# Altium PCB FLIR LWIR.PcbDoc (part 2 of 5)
Units mil, origin at the board's own origin, x right, y up, seen from the top; angles counter-clockwise.
Board outline 1511 x 3115 mil, 2 copper layers (Top Layer, Bottom Layer); 105 components, 128 nets, 625 pads, 229 vias.
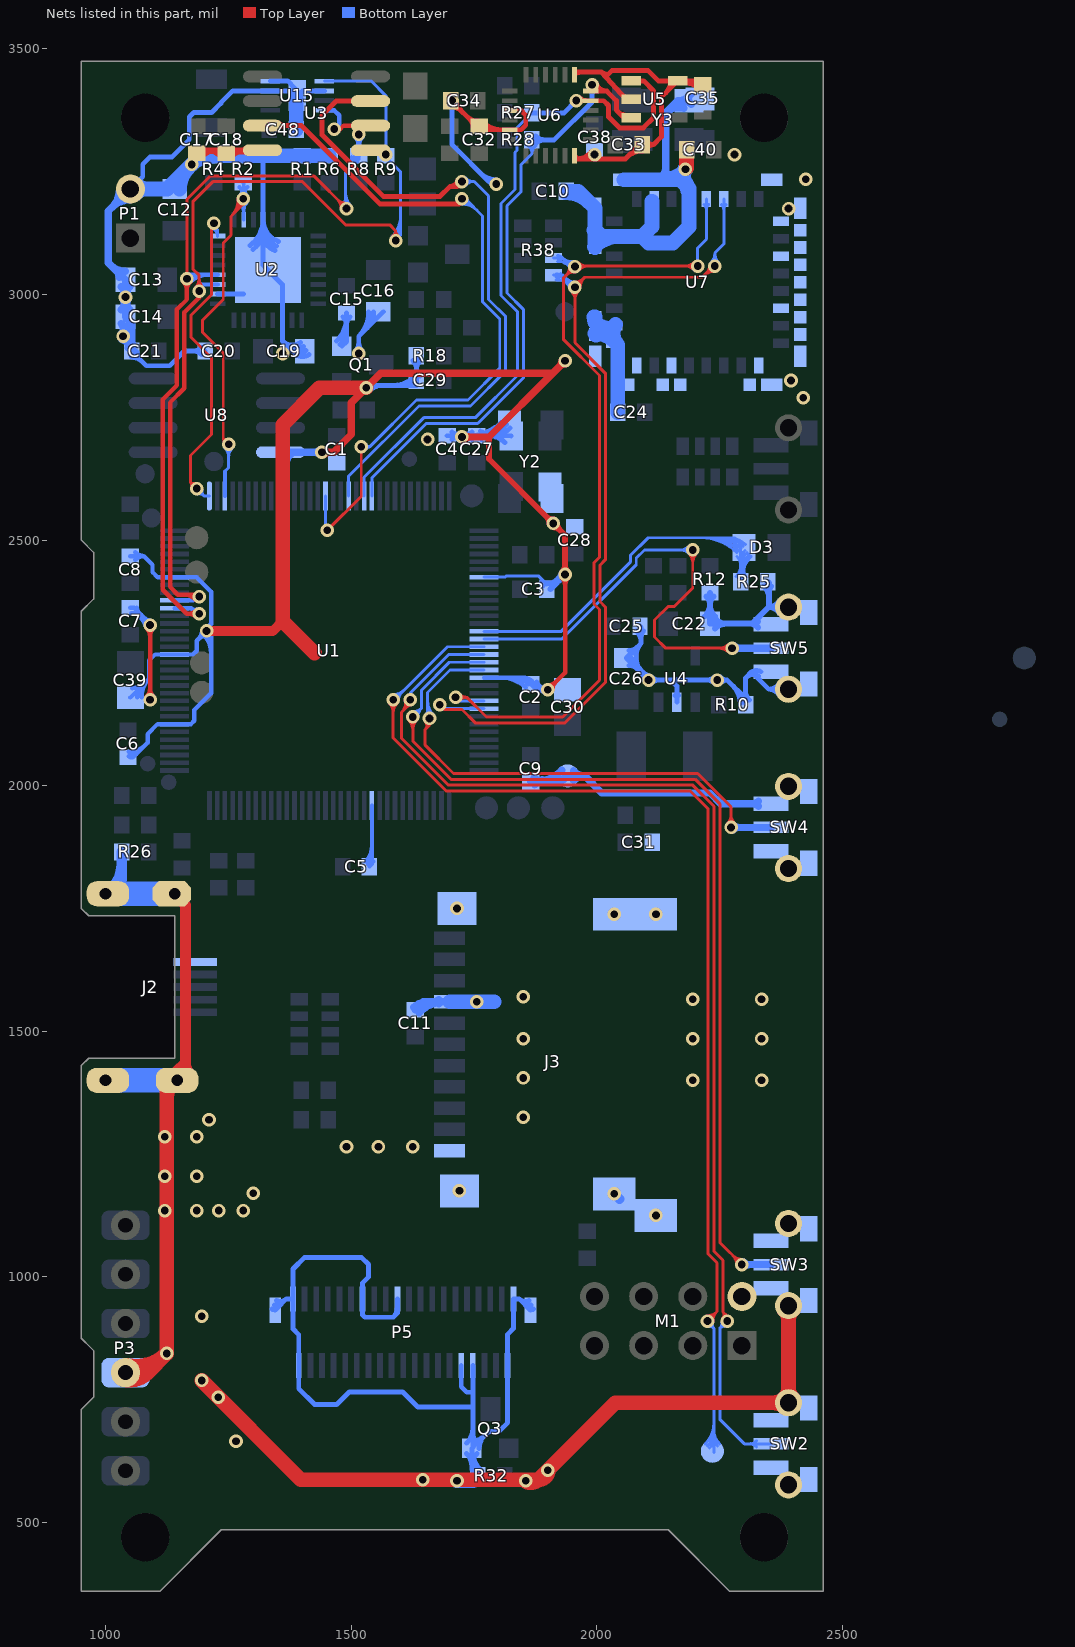
[diagram p2: the nets of this part, all layers, seen from the top]

## Via types
v1: diameter 27.56, hole 15.75, Top Layer to Bottom Layer, tented both sides, 229 vias

## Nets (pads, with @x,y where several pads share a name; then routed paths per layer and width w, separated by ;. In a path a pad name is that pad's centre, name@x,y a point inside that pad or via, vN(x,y) a via of type N, cw(c..) or ccw(c..) an arc to the next point about the centre after c; other vN are vias at no path point) (continued)
GND: C1.1 C2.1 C3.1 C4.1 C5.1 C6.1 C7.1 C8.1 C9.1 C10.1 C11.1 C12.1 C13.1 C14.1 C15.1 C16.1 C17.2 C18.2 C19.1 C20.1 C21.1 C22.1 C24.1 C25.1 C26.1 C27.2 C28.1 C29.2 C30.1 C31.2 C32.1 C33.1 C34.1 C35.1 C38.2 C39.2 C40.2 C48.1 J2.5 J3.3 J3.6 M1.2 P1.2 P3.3 P5.0 P5.1 P5.2 P5.13 P5.19 P5.30 P5.32 P5.38 P5.39 pad.1@1940,2020 pad.2 Q1.2 Q3.3 R1.2 R2.1 R4.1 R6.2 R10.2 R12.1 R18.1 R25.2 R26.1 R32.2 SW2.1 SW3.1 SW4.1 SW5.1 U1.11 U1.39 U1.52 U1.75 U1.103 U1.112 U1.122 U2.11 U2.18 U2.28 U2.33 U3.4 U4.2 U5.2 U5.5 U6.1 U6.9 U6.11 U6.18 U7.1 U7.6 U7.8 U7.9 U7.10 U7.15 U7.18 U7.20 U7.25 U7.27 U7.30 U7.33 U7.34 U7.35 U7.36 U7.37 U7.38 U7.39 U7.40 U7.41 U7.42 U7.43 U7.44 U7.52 U7.53 U7.54 U7.55 U7.57 U7.58 U7.59 U7.60 U7.61 U7.62 U7.66 U7.67 U7.68 U8.4 U15.2 U15.7 U15.8 U15.9 Y2.2 Y2.4 Y3.2 | length 22689.3
  Top Layer w9: v1@1083.44,2181.56 ccw(c1067.6,2197.4) 1090,2197.4 ccw(c1112.4,2197.4) v1@1096.56,2181.56 ; v1@1083.44,2320.44 cw(c1067.6,2304.6) 1090,2304.6 cw(c1112.4,2304.6) v1@1096.56,2320.44 ; v1(1090,2175) v1(1090,2327) ; v1(1900,2195.43) 1900.43,2195.43 1935,2230 v1(1935,2430) ; v1@1900,2204.71 ccw(c1900,2228.16) 1916.58,2211.58 ; v1@1909.28,2195.43 cw(c1930.64,2195.43) 1915.53,2210.53 ; v1@1928.44,2423.44 cw(c1912.6,2407.6) 1935,2407.6 cw(c1957.4,2407.6) v1@1941.56,2423.44
  Top Layer w10: C17.2@1185,3287.44 1191.56,3294 U3.4@1319,3294 ; C17.2@1187.5,3286.91 cw(c1204.61,3269.8) 1204.61,3294 ; C17.2@1194.57,3279.84 cw(c1228.75,3245.66) C18.2@1228.75,3294 ; C17.2@1201.25,3294 cw(c1201.25,3245.66) C18.2@1235.43,3279.84 ; 1225.39,3294 cw(c1225.39,3269.8) C18.2@1242.5,3286.91 ; C18.2@1247.5,3286.91 cw(c1264.61,3269.8) 1264.61,3294 ; C18.2@1254.57,3279.84 cw(c1288.75,3245.66) U3.4@1288.75,3294 ; 1273.17,3289.82 cw(c1278.06,3271.58) U3.4@1287.5,3287.94 ; 1275.88,3290.55 ccw(c1272.02,3304.96) U3.4@1284.94,3297.5 ; U3.4@1286.05,3289.05 ccw(c1274.1,3277.1) 1274.1,3294 ccw(c1274.1,3310.9) U3.4@1286.05,3298.95 ; C34.1@1702.44,3382.28 cw(c1702.44,3351.58) 1724.15,3373.29 ; C34.1@1702.44,3395 1754.88,3342.56 C32.1@1760,3342.56 1767.09,3335.47 U6.11@1822.28,3335.47 1845.47,3335.47 1855,3345 1855,3365 1845.16,3374.84 U6.9@1822.28,3374.84 ; C34.1@1703.83,3394.64 ccw(c1728.81,3402.24) 1722.05,3377.03 ; C34.1@1705,3386.22 cw(c1705,3371.2) C34.1@1715.62,3381.82 ; C34.1@1713.19,3393.03 ccw(c1734.38,3393.03) 1719.4,3378.04 ; C34.1@1713.78,3395 ccw(c1741.15,3395) 1721.8,3375.64 ; 1734.31,3363.13 ccw(c1758.03,3386.86) C32.1@1758.03,3353.31 ; 1741.91,3355.53 cw(c1728.94,3342.56) C32.1@1747.28,3342.56 ; C32.1@1762.5,3343.09 ccw(c1780.88,3361.47) 1780.88,3335.47 ; C32.1@1769.57,3350.16 ccw(c1805.03,3385.62) 1805.03,3335.47 ; U6.1@1954.16,3447.78 cw(c1966.09,3435.84) 1966.09,3452.72 ; U6.18@1954.21,3282.28 1960.2,3276.28 ; U6.1@1954.21,3452.72 2009.12,3452.72 ; 1980.09,3276.28 ccw(c1980.09,3296.07) v1@1995.98,3284.27 ; v1@1987.95,3290.24 cw(c1960.21,3310.85) 1960.21,3276.28 ; U5.2@2050.69,3407 ccw(c2061.05,3416.42) U5.2@2060.39,3402.44 ; U5.2@2052.89,3404.58 cw(c2045.95,3398.27) U5.2@2055.32,3397.83 ; 2060.44,3278.98 cw(c2092.56,3246.86) C33.1@2092.56,3292.28 ; U5.2@2070,3397.6 2059.24,3397.6 2009.12,3452.72 ; C33.1@2077.51,3296.05 cw(c2092.56,3281.01) C33.1@2092.56,3302.28 ; C33.1@2100.93,3298.26 cw(c2115,3286.95) 2115,3305 ; C33.1@2100.93,3311.74 ccw(c2115,3323.05) 2115,3305 ; 2139.42,3409.93 ccw(c2114.35,3435) U5.5@2149.8,3435 ; U5.5@2151.22,3431.58 ccw(c2142.95,3423.31) 2142.95,3435 ccw(c2142.95,3446.69) U5.5@2151.22,3438.42 ; U5.5@2169.12,3435 cw(c2169.12,3383.65) C35.1@2205.43,3419.96 ; U5.5@2177.75,3431.58 cw(c2186.02,3423.31) 2186.02,3435 cw(c2186.02,3446.69) U5.5@2177.75,3438.42 ; U5.5@2178.52,3437.42 ccw(c2192.64,3445.57) 2188.42,3429.83 ; 2193.26,3435 cw(c2193.26,3407.79) C35.1@2212.5,3427.03 ; C35.1@2215,3427.56 2207.56,3435 U5.5@2164.49,3435 ; 1960.2,3276.28 2057.75,3276.28 2086.46,3305 C33.1@2092.56,3305 2115,3305 ; 2009.12,3452.72 2021.88,3447.72 2030,3455.84 2104.16,3455.84 2125,3435 U5.5@2164.49,3435 ; 2115,3305 2131,3321 2131,3401.51 U5.5@2164.49,3435
  Top Layer w12: 1780,2710 1780,2665 v1(1910.97,2534.03) 1935,2510 v1(1935,2430) ; v1@1903.19,2534.03 ccw(c1884.41,2534.03) 1897.69,2547.31 ccw(c1910.97,2560.59) v1@1910.97,2541.81 ; v1@1910.97,2526.25 cw(c1910.97,2507.47) 1924.25,2520.75 cw(c1937.53,2534.03) v1@1918.75,2534.03 ; v1@1929.5,2435.5 ccw(c1916.22,2448.78) 1935,2448.78 ccw(c1953.78,2448.78) v1@1940.5,2435.5
  Top Layer w15: v1(1440,2679) 1464,2679 1500,2715 1500,2780 v1(1530,2810) 1560,2840 1910,2840 ; v1@1444.44,2674.56 cw(c1455.16,2663.84) 1455.16,2679 cw(c1455.16,2694.16) v1@1444.44,2683.44 ; v1@1523.72,2810 cw(c1508.56,2810) 1519.28,2799.28 cw(c1530,2788.56) v1@1530,2803.72 ; v1@1530,2816.28 ccw(c1530,2831.44) 1540.72,2820.72 ccw(c1551.44,2810) v1@1536.28,2810 ; v1(1725,2710) 1780,2710 1910,2840 ; v1@1729.44,2705.56 cw(c1740.16,2694.84) 1740.16,2710 cw(c1740.16,2725.16) v1@1729.44,2714.44 ; v1@1928.72,2865 cw(c1913.56,2865) 1924.28,2854.28 cw(c1935,2843.56) v1@1935,2858.72 ; v1(1935,2865) 1910,2840
  Top Layer w20: v1(1205,2315) 1340,2315 1360,2335
  Top Layer w22: J2.5@1140,1780 1140,1779 1162,1757 1162,1435.89 ; J2.5@1145,1400 1145,1418.89 1162,1435.89 ; 1162,1436.95 ccw(c1199.67,1436.95) J2.5@1173.03,1410.32 ; J2.5@1172.81,1410.53 cw(c1197.13,1435.89) 1162,1435.89 ; J2.5@1152.4,1410.32 ccw(c1129.22,1433.49) 1162,1433.49 cw(c1129.22,1433.49) J2.5@1152.4,1410.32
  Top Layer w30: pad.2@1036.99,790.31 ccw(c1047.52,841.66) 1084.59,804.59 ; pad.2@1040,805 1085,805 v1(1124,844) ; pad.2@1043.01,819.69 ccw(c1060.93,907.06) v1(1124,844) ; pad.2@1050.61,794.39 cw(c1076.21,768.79) 1076.21,805 cw(c1076.21,841.21) pad.2@1050.61,815.61 ; 1124,1366.51 cw(c1160.78,1366.51) J2.5@1134.77,1392.51 ; J2.5@1124,1406 v1(1124,844) ; v1(1195,788.98) 1396.98,587 1880.84,587 ; 1425,2270 1360,2335 1360,2735 1435,2810 v1(1530,2810) ; v1@1854.35,583.96 ccw(c1865.69,602.15) 1880.84,587 ; v1@1901.22,606.08 cw(c1880.84,607.42) 1880.84,587 ; v1@2182.44,3257.44 C40.2@2182.44,3295 ; SW2.1@2381.12,734.78 ccw(c2359.68,713.34) 2359.68,743.66 ccw(c2359.68,773.98) 2381.12,752.54 ccw(c2359.68,773.98) 2390,773.98 ccw(c2420.32,773.98) SW2.1@2398.88,752.54 ; SW3.1@2381.12,932.46 cw(c2359.68,911.02) 2390,911.02 cw(c2420.32,911.02) SW3.1@2398.88,932.46 ; SW3.1@2390,941.34 SW2.1@2390,743.66 2037.5,743.66 1880.84,587
  Bottom Layer w6: U1.39@1769.96,2424.61 1812.89,2424.61 1815,2426.72 1881.72,2426.72 ; C3.1@1885.75,2406.77 ccw(c1868.71,2413.7) 1881.72,2426.72 ; 1888.11,2420.32 cw(c1877.8,2410.01) C3.1@1891.31,2404.51 ; C3.1@1891,2417.43 ccw(c1897.56,2423.99) C3.1@1897.56,2414.72 ; C3.1@1897.56,2410.87 1881.72,2426.72
  Bottom Layer w8: C5.1@1528.25,1845.28 ccw(c1495.99,1877.54) 1541.61,1877.54 ; C5.1@1533.91,1839.62 ccw(c1515.31,1858.22) 1541.61,1858.22 ; C5.1@1536.56,1835 1541.61,1840.06 U1.75@1541.61,1960.04 ; 1541.61,1853.13 ccw(c1552.72,1853.13) C5.1@1544.87,1845.28
  Bottom Layer w9: C6.1@1046.97,2059.69 ccw(c1046.97,2084.36) 1064.42,2066.92 ; C6.1@1046.97,2068.69 ccw(c1046.97,2115.09) 1079.78,2082.28 ; C6.1@1050,2057.44 1054.94,2057.44 1085,2087.5 1085,2105 1105.39,2125.39 U1.103@1140.04,2125.39 1173.39,2125.39 1180.07,2132.07 1180.07,2154.07 1214.28,2188.28 v1@1214.28,2320 ; C39.2@1050,2179.57 1088.06,2217.63 1088.06,2255 1100.18,2267.13 U1.112@1140.04,2267.13 1177.13,2267.13 1185,2275 1185,2295 v1(1205,2315) ; C7.1@1050,2362.56 1057.44,2362.56 v1@1085,2335 ; C8.1@1050,2467.56 1077.44,2467.56 ; C7.1@1051.97,2351.31 cw(c1051.97,2310.94) 1080.51,2339.49 ; C39.2@1053.94,2198.69 ccw(c1053.94,2235.35) 1079.86,2209.43 ; C8.1@1060.28,2459.98 cw(c1077.44,2444.34) 1077.44,2467.56 ; C8.1@1060.28,2475.14 ccw(c1077.44,2490.78) 1077.44,2467.56 ; C7.1@1060.94,2350.79 cw(c1039.38,2313.44) v1@1081.04,2324.6 ; C7.1@1063.22,2362.56 ccw(c1077.16,2362.56) C7.1@1067.3,2352.7 ; C39.2@1064.06,2179.82 cw(c1095.4,2180.62) C39.2@1073.23,2202.8 ; 1072.04,2347.96 cw(c1051.08,2327) v1@1080.72,2327 ; C39.2@1073.05,2180.05 cw(c1124.32,2181.36) 1088.06,2217.62 ; 1079.28,2340.72 ccw(c1090,2351.44) v1@1090,2336.28 ; 1079.76,2339.92 cw(c1069.06,2321.39) v1@1089.73,2326.93 ; v1@1195.72,2315 cw(c1173.32,2315) 1189.16,2299.16 cw(c1205,2283.32) v1@1205,2305.72 ; v1@1198.44,2308.44 cw(c1160.19,2270.19) 1214.28,2270.19 ; v1@1204.8,2314.8 cw(c1181.92,2291.92) 1214.28,2291.92 ; v1@1205,2324.28 ccw(c1205,2334.61) 1212.31,2327.31 ; v1@1209.64,2324.64 1214.28,2329.28 ; v1@1213.02,2319.66 cw(c1219.9,2323.65) 1214.28,2329.28 ; U8.4@1355.67,2679 1368.39,2666.28 U1.11@1368.39,2589.96 ; 1368.39,2647.76 cw(c1405.07,2647.76) U8.4@1379.13,2673.7 ; 1368.39,2665.17 cw(c1374.75,2665.17) U8.4@1374.32,2671.52 ; U1.52@1769.96,2219.88 1852.68,2219.88 C2.1@1865,2207.56 1877.13,2195.43 v1(1900,2195.43) cw(c1900,2219.21) C2.1@1877.58,2211.3 ; 1806.13,2219.88 cw(c1806.13,2150.65) C2.1@1855.08,2199.61 ; 1827.85,2219.88 cw(c1827.85,2172.38) C2.1@1861.44,2205.97 ; C2.1@1849.58,2219.88 cw(c1849.58,2194.11) C2.1@1867.81,2212.33 ; C2.1@1869.09,2208.31 ccw(c1887.28,2214.72) v1@1887.28,2195.43 ; 1883.14,2196.54 ccw(c1885.19,2204.2) v1@1892.01,2200.16 ; 1885.19,2195.99 cw(c1882.3,2185.21) v1@1891.96,2190.79 ; v1@1893.44,2188.87 ccw(c1877.6,2173.03) 1877.6,2195.43 ccw(c1877.6,2217.84) v1@1893.44,2201.99 ; 1077.44,2467.56 1095,2450 1095,2435 1105.39,2424.61 U1.122@1140.04,2424.61 1184.73,2424.61 1214.28,2395.06 1214.28,2329.28
  Bottom Layer w10: C21.1@1052.44,2872.28 cw(c1052.44,2841.58) 1074.15,2863.29 ; C21.1@1052.44,2885 1082.44,2855 1130,2855 1160,2885 C20.1@1202.44,2885 ; P1.2@1060.27,3225.27 1075.22,3240.22 1075.22,3265.26 1089.74,3279.78 1134.27,3279.78 1169.75,3315.25 1169.75,3361.48 1178.95,3370.69 1215.69,3370.69 1234.14,3389.14 1234.14,3390.26 1258.57,3414.68 U15.7@1335,3414.68 1380.16,3414.68 U15.9@1390,3404.84 ; C21.1@1063.19,2883.03 ccw(c1084.38,2883.03) 1069.4,2868.04 ; C20.1@1194.84,2877.4 ccw(c1176.49,2859.05) 1176.49,2885 ccw(c1176.49,2910.95) C20.1@1194.84,2892.6 ; U2.18@1227.59,3000.79 U2.33@1280.79,3000.79 ; U2.33@1293.53,3100.05 ccw(c1255.38,3152.4) U2.28@1320.16,3152.41 ; U2.33@1299.42,3091.97 ccw(c1269.7,3132.74) 1320.16,3132.74 ; 1320.16,3123.87 ccw(c1356.81,3123.87) U2.33@1344.31,3089.41 ; U2.28@1320.16,3138.14 ccw(c1361.99,3138.14) U2.33@1347.72,3098.81 ; 1320.16,3282.56 U2.28@1320.16,3152.41 ; U15.8@1335,3435 1370,3435 U15.9@1385,3420 ; P5.0@1338.52,934.15 ccw(c1342.3,941.47) P5.0@1348.12,935.64 ; P5.0@1343.1,943.03 ccw(c1348.89,954.23) 1357.8,945.32 ; P5.0@1344.57,932.09 1367.48,955 ; P5.0@1347.69,951.92 ccw(c1355.48,967) 1367.48,955 ; U2.33@1351.13,3108.21 cw(c1367.17,3152.41) U2.28@1320.16,3152.41 ; v1@1359.11,2880.84 cw(c1388.78,2852.94) C19.1@1387.53,2893.64 ; 1367.94,2897.06 ccw(c1386.8,2915.91) C19.1@1402.13,2894.09 ; 1376.36,2888.64 ccw(c1393.74,2906.03) C19.1@1407.87,2885.91 ; 1384.77,2880.23 ccw(c1400.69,2896.14) C19.1@1413.62,2877.73 ; C19.1@1391.76,2877.94 ccw(c1380,2871.67) 1380,2885 ; C19.1@1391.76,2892.06 cw(c1380,2898.33) 1380,2885 ; C19.1@1396.38,2902.27 cw(c1379.86,2925.8) 1359.53,2905.47 ; U15.9@1399.84,3414.68 U15.2@1445,3414.68 ; C19.1@1405,2885 1380,2885 ; Q1.2@1470.02,2905.49 ccw(c1421.8,2953.72) C15.1@1490,2953.72 ; Q1.2@1477.09,2898.42 ccw(c1445.94,2929.57) 1490,2929.57 ; Q1.2@1480.63,2894.88 1490,2904.25 C15.1@1490,2962.44 ; C15.1@1482.4,2954.84 cw(c1464.05,2936.49) 1490,2936.49 cw(c1515.95,2936.49) C15.1@1497.6,2954.84 ; 1484.78,754.74 1470.04,740 1425,740 1392.83,772.17 P5.2@1392.83,819.17 1392.83,882.17 1381.02,893.98 P5.1@1381.02,955 ; 1484.78,754.78 1495.62,765.62 1604.38,765.62 1635,735 1740,735 ; v1@1508.79,2886.21 ccw(c1493.8,2901.2) 1515,2901.2 ccw(c1536.2,2901.2) v1@1521.21,2886.21 ; v1@1515,2890 1515,2915 ; v1@1530,2815 1632.44,2815 C29.2@1632.44,2825 R18.1@1632.44,2870 ; 1531.6,2931.6 ccw(c1499.22,2963.98) C16.1@1545,2964.9 ; C16.1@1535,2964.7 cw(c1466.68,2963.32) 1515,2915 ; v1@1536.21,2803.79 cw(c1563.27,2776.73) 1563.27,2815 ; C16.1@1565,2965 1515,2915 ; 1585.77,918.55 ccw(c1569.01,935.32) P5.19@1592.72,935.32 ; 1587.1,2815 ccw(c1587.1,2868.37) C29.2@1624.84,2830.63 ; P5.19@1593.62,955 1593.62,926.4 1585,917.78 1527.22,917.78 1522.76,922.24 P5.13@1522.76,955 1522.76,987.76 1535,1000 1535,1025.04 1520.26,1039.78 1404.78,1039.78 1381.02,1016.02 P5.1@1381.02,955 ; 1611.25,2815 ccw(c1611.25,2844.23) C29.2@1631.91,2823.56 ; C29.2@1624.84,2834.57 ccw(c1606.49,2852.92) 1632.44,2852.92 ccw(c1658.39,2852.92) C29.2@1640.04,2834.57 ; R18.1@1624.84,2865.43 cw(c1606.49,2847.08) 1632.44,2847.08 cw(c1658.39,2847.08) R18.1@1640.04,2865.43 ; C4.1@1695,2712.56 1824.94,2712.56 Y2.2@1825.5,2712 ; C4.1@1697.63,2712.56 cw(c1697.63,2682.63) v1@1718.79,2703.79 ; v1@1698.79,3388.79 cw(c1683.8,3373.8) 1705,3373.8 cw(c1726.2,3373.8) v1@1711.21,3388.79 ; C4.1@1704.57,2704.96 cw(c1722.92,2686.61) 1722.92,2712.56 cw(c1722.92,2738.51) C4.1@1704.57,2720.16 ; v1(1705,3395) 1705,3305 1780,3230 ; C4.1@1706.71,2716.9 cw(c1703.02,2703.15) v1@1716.62,2707.39 ; C4.1@1709.53,2716.15 ccw(c1713.31,2730.25) v1@1720.61,2717.6 ; C4.1@1709.98,2712.56 ccw(c1709.98,2725.02) v1@1718.79,2716.21 ; P5.30@1723.54,819.17 1723.54,776.46 1735,765 1747.16,765 ; v1@1729.39,2717.6 ccw(c1736.69,2730.25) C27.2@1740.47,2716.15 ; v1@1730.16,2717.1 ccw(c1741.4,2732.57) C27.2@1744.39,2713.68 ; v1@1731.21,2703.79 cw(c1752.37,2682.63) C27.2@1752.37,2712.56 ; v1@1731.21,2716.21 ccw(c1740.02,2725.02) C27.2@1740.02,2712.56 ; v1@1732.1,2704.84 cw(c1750.92,2691.16) C27.2@1747.29,2714.14 ; v1@1733.38,2707.39 cw(c1746.98,2703.15) C27.2@1743.29,2716.9 ; Q3.3@1734.51,640.02 cw(c1708.9,614.42) 1745.12,614.42 cw(c1781.33,614.42) Q3.3@1755.72,640.02 ; Q3.3@1734.51,661.24 ccw(c1703.97,691.78) 1747.16,691.78 ; C27.2@1737.29,2712.56 ccw(c1737.29,2813.3) Y2.2@1808.53,2742.07 ; 1745.12,627.37 ccw(c1786.26,627.37) R32.2@1757.96,597.51 ; Q3.3@1745.12,665.63 ccw(c1745.12,701.84) 1770.72,676.24 ccw(c1796.33,650.63) Q3.3@1760.12,650.63 ; C27.2@1745.43,2704.96 ccw(c1727.08,2686.61) 1727.08,2712.56 ccw(c1727.08,2738.51) C27.2@1745.43,2720.16 ; 1747.16,681.9 ccw(c1776.39,681.9) Q3.3@1755.72,661.24 ; P5.32@1747.16,819.17 1747.16,765 ; R32.2@1757.44,595 1745.12,607.32 Q3.3@1745.12,650.63 ccw(c1808.31,650.63) R32.2@1764.84,604.77 ; C27.2@1761.43,2712.56 ccw(c1761.43,2789.16) Y2.2@1815.6,2734.99 ; C27.2@1762.34,2721.87 ccw(c1777.29,2747.76) 1785.03,2718.88 ; 1762.94,3247.06 ccw(c1795,3279.12) v1@1795,3233.78 ; C27.2@1764.57,2704.96 cw(c1782.92,2686.61) 1782.92,2712.56 cw(c1782.92,2738.51) C27.2@1764.57,2720.16 ; 1779.19,2712.56 cw(c1779.19,2665.69) Y2.2@1812.33,2698.83 ; 1779.64,2717.44 ccw(c1785.33,2696.18) 1766.28,2707.19 cw(c1803.81,2685.52) 1792.59,2727.38 ; 1781.89,2712.56 ccw(c1781.89,2755.61) Y2.2@1812.33,2725.17 ; 1785.57,2712.56 ccw(c1785.57,2765.02) Y2.2@1822.67,2727.92 ; v1@1786.25,3224.26 ccw(c1780,3223.73) 1780,3230 ; v1@1790,3230 1780,3230 ; v1@1795,3223.78 cw(c1795,3244.98) 1780.01,3229.99 ; Y2.2@1803.09,2729.77 cw(c1784.41,2730.64) 1793.76,2714.45 cw(c1801.76,2700.59) Y2.2@1810.97,2713.67 ; 1851.33,945.32 ccw(c1860.25,954.23) P5.0@1866.03,943.03 ; P5.0@1861.01,935.64 ccw(c1866.84,941.47) P5.0@1870.62,934.15 ; P5.0@1861.44,951.92 cw(c1853.66,967) 1841.65,955 ; P5.0@1864.57,932.09 1841.65,955 ; C26.1@2065,2245 cw(c2065,2220.86) 2082.07,2237.93 ; C26.1@2065,2275 ccw(c2065,2299.14) 2082.07,2282.07 ; C26.1@2070,2260 ccw(c2094.14,2260) C26.1@2077.07,2242.93 ; C26.1@2079.92,2261.56 cw(c2114.79,2265.2) 2090,2290 ; C25.1@2079.96,2315.43 cw(c2055.72,2291.19) 2090,2291.19 ; C26.1@2080,2260 ccw(c2128.28,2260) 2094.14,2225.86 ; 2086.16,2239.68 ccw(c2116.27,2257.06) v1@2107.27,2223.48 ; C25.1@2087.56,2325 2090,2322.56 2090,2290 ; 2090,2302.98 cw(c2107.61,2302.98) C25.1@2095.16,2315.43 ; v1@2096.22,2215 ccw(c2075.02,2215) 2090.01,2229.99 ccw(c2105,2244.98) v1@2105,2223.78 ; v1@2111.21,2208.79 cw(c2126.2,2193.8) 2126.2,2215 cw(c2126.2,2236.2) v1@2111.21,2221.21 ; U4.2@2159.17,2183.27 ccw(c2150.91,2191.53) 2162.6,2191.53 ccw(c2174.29,2191.53) U4.2@2166.02,2183.27 ; U4.2@2162.6,2170 2162.6,2202.6 2150.2,2215 ; v1@2238.79,2208.79 ccw(c2223.8,2193.8) 2223.8,2215 ccw(c2223.8,2236.2) v1@2238.79,2221.21 ; v1@2251.46,2209.06 cw(c2265,2196.61) 2265,2215 ; v1@2251.46,2220.94 ccw(c2265,2233.39) 2265,2215 ; 2276.81,2203.19 cw(c2240.58,2166.97) R10.2@2291.81,2166.97 ; 2293.88,2186.12 cw(c2274.72,2166.97) R10.2@2301.81,2166.97 ; R10.2@2294.96,2174.57 ccw(c2276.61,2192.92) 2302.56,2192.92 ccw(c2328.51,2192.92) R10.2@2310.16,2174.57 ; 2311.81,2229.01 cw(c2324.85,2215.97) SW5.1@2334.02,2231.98 ; SW5.1@2329.05,2223.3 ccw(c2318.11,2204.21) 2302.56,2219.76 ; SW5.1@2370.69,2184.67 ccw(c2350,2172.16) 2350,2196.34 ; SW5.1@2370.69,2208.01 cw(c2350,2220.52) 2350,2196.34 ; SW5.1@2391.34,2207.17 2380.51,2196.34 2350,2196.34 ; U2.28@1320.16,3152.41 1320.16,3059.84 U2.33@1330,3050 1359.53,3020.47 U2.11@1359.53,2947.59 1359.53,2905.47 ; 1359.53,2905.47 1380,2885 ; 1367.48,955 P5.1@1381.02,955 ; 1747.16,765 1747.16,652.68 1779.49,685 1800,685 1818.03,703.03 P5.38@1818.03,819.17 1818.03,883.03 1829.84,894.84 P5.39@1829.84,955 1841.65,955 ; 2090,2290 C26.1@2060,2260 v1(2105,2215) 2150.2,2215 ; 2150.2,2215 2265,2215 ; 2265,2215 2302.56,2177.44 2302.56,2219.76 ; 2302.56,2219.76 2314.57,2231.77 2350,2196.34
  Bottom Layer w12: C3.1@1897.56,2411.72 ccw(c1897.56,2457.97) v1@1930.26,2425.26 ; C3.1@1905,2400 v1(1935,2430) ; 1915.98,2417.01 ccw(c1903.63,2438.41) v1@1927.49,2432.01 ; 1923.23,2421.2 cw(c1929.66,2410.06) v1@1932.99,2422.49 ; v1@1927.22,2430 cw(c1908.44,2430) 1921.72,2416.72 cw(c1935,2403.44) v1@1935,2422.22 ; C22.1@2220.1,2344.9 ccw(c2196.2,2368.8) 2230,2368.8 ccw(c2263.8,2368.8) C22.1@2239.9,2344.9 ; R12.1@2223.11,2385.55 cw(c2206.47,2368.91) 2230,2368.91 cw(c2253.53,2368.91) R12.1@2236.89,2385.55 ; R12.1@2230,2392.44 C22.1@2230,2330 2316.34,2330 ; C22.1@2239.9,2320.1 cw(c2263.8,2296.2) 2263.8,2330 cw(c2263.8,2363.8) C22.1@2239.9,2339.9 ; 2308.46,2330 cw(c2308.46,2302.79) SW5.1@2327.7,2322.03 ; SW5.1@2326.16,2324.1 ccw(c2316.34,2318.86) 2316.34,2330 ; R25.2@2340.67,2406.14 cw(c2318.13,2383.6) 2350,2383.6 ; R25.2@2347.56,2415 2350,2412.56 2350,2363.66 ; 2350,2395.39 cw(c2365.2,2395.39) R25.2@2354.45,2406.14 ; SW5.1@2371.99,2351.81 ccw(c2350,2337.34) 2350,2363.66 ; SW5.1@2371.99,2375.51 cw(c2350,2389.99) 2350,2363.66 ; SW5.1@2391.34,2352.83 2380.51,2363.66 2350,2363.66 ; 2316.34,2330 2350,2363.66 ; 2317.02,2330 ccw(c2317.02,2345.11) 2327.7,2334.43 cw(c2317.02,2345.11) 2317.02,2330
  Bottom Layer w15: 1010.13,3059.87 ccw(c1040,3089.75) C13.1@1040,3047.5 ; C13.1@1022.2,3047.8 cw(c1009.39,3035) C13.1@1027.5,3035 ; P1.2@1027.97,3215 cw(c974.79,3215) 1012.4,3177.4 cw(c1050,3139.79) P1.2@1050,3192.97 ; v1@1031.08,2919.91 ccw(c1022.92,2930.14) C14.1@1033.62,2937.68 ; C14.1@1031.16,2941.16 cw(c979.79,2889.79) C21.1@1052.44,2889.79 ; C14.1@1031.16,2968.84 ccw(c1009.82,2990.18) 1040,2990.18 ccw(c1070.18,2990.18) C14.1@1048.84,2968.84 ; C13.1@1031.16,3016.16 cw(c1009.82,2994.82) v1(1040,2994.82) cw(c1070.18,2994.82) C13.1@1048.84,3016.16 ; v1@1032.72,2909.15 cw(c1021.48,2880.3) C21.1@1052.44,2880.3 ; v1@1033.74,2908.85 cw(c1027.36,2877.77) C21.1@1054.83,2893.64 ; v1@1033.93,2908.81 cw(c1031.13,2892.65) C21.1@1047.54,2892.65 ; v1@1034.07,2921.21 ccw(c1030.85,2942.56) C14.1@1052.44,2942.56 ; v1@1034.57,2991.67 cw(c1017.98,2982.06) C14.1@1036.5,2977.1 ; v1@1034.56,2997.96 ccw(c1021.43,3005.54) 1036.08,3009.47 ccw(c1050.72,3013.39) v1@1043.14,3000.26 ; v1@1035.56,2990.38 cw(c1024.84,2979.66) 1040,2979.66 cw(c1055.16,2979.66) v1@1044.44,2990.38 ; v1@1035.56,2999.26 ccw(c1024.84,3009.98) 1040,3009.98 ccw(c1055.16,3009.98) v1@1044.44,2999.26 ; v1@1036.3,2906.38 ccw(c1033.47,2925.13) 1052.44,2925.13 ; v1@1036.86,3000.26 ccw(c1029.28,3013.39) 1043.92,3009.47 ccw(c1058.57,3005.54) v1@1045.44,2997.96 ; v1@1038.17,2923.13 cw(c1030.03,2902.24) C21.1@1052.44,2902.24 ; C14.1@1041.77,2951.77 cw(c1016,2926) 1052.44,2926 ; C14.1@1043.5,2977.1 cw(c1062.02,2982.06) v1@1045.43,2991.67 ; C21.1@1045.3,2891.09 ccw(c1025.9,2902.29) 1047.54,2908.09 ; C21.1@1046.61,2892.8 ccw(c1032.53,2906.88) 1052.44,2906.88 ccw(c1072.35,2906.88) C21.1@1058.27,2892.8 ; 1048.45,2904.69 ccw(c1065.28,2909.2) C21.1@1056.57,2894.11 ; P1.2@1050,3215 1005,3170 1005,3065 C13.1@1040,3030 C14.1@1040,2955 C14.1@1052.44,2942.56 ; C21.1@1052.44,2885 C14.1@1052.44,2942.56 ; U8.4@1355.67,2679 v1(1440,2679) ; v1@1435.56,2674.56 ccw(c1424.84,2663.84) 1424.84,2679 ccw(c1424.84,2694.16) v1@1435.56,2683.44 ; C11.1@1627.19,1548.58 cw(c1654.57,1521.21) 1654.57,1559.92 ; C11.1@1630,1543.81 1646.11,1559.92 ; C11.1@1631.97,1552.06 ccw(c1631.97,1567.22) C11.1@1642.69,1556.5 ; C11.1@1637.8,1537.98 cw(c1690.78,1485) J3.6@1690.78,1559.92 ; C11.1@1640.2,1544.31 cw(c1660.47,1545.56) 1646.11,1559.92 ; J3.6@1677.84,1555.48 ccw(c1667.12,1544.76) 1667.12,1559.92 ccw(c1667.12,1575.08) J3.6@1677.84,1564.36 ; J3.6@1700,1559.92 1646.11,1559.92 ; C9.1@1865,2007.44 1927.44,2007.44 pad.1@1940,2020 1975,2020 ; C9.1@1870.76,2007.44 ccw(c1870.76,2089.24) pad.1@1928.6,2031.4 ; C9.1@1871.09,2014.58 ccw(c1882.72,2034.73) 1888.74,2012.26 ; C9.1@1872.8,2001.61 cw(c1886.88,1987.53) 1886.88,2007.44 cw(c1886.88,2027.35) C9.1@1872.8,2013.27 ; C9.1@1874.11,2003.32 cw(c1888.46,1995.04) 1884.17,2011.03 ; 1906.97,2007.44 ccw(c1906.97,2053.03) pad.1@1939.21,2020.79 ; pad.1@1952.25,2009.52 cw(c1975,1990.07) 1975,2020 ; pad.1@1952.25,2030.48 ccw(c1975,2049.93) 1975,2020 ; U7.55@2130.39,3237.6 ccw(c2107.19,3260.8) 2140,3260.8 ; U7.55@2134.13,3233.86 2140,3239.72 2140,3370 ; Y3.2@2157.66,3387.66 cw(c2174.01,3371.31) Y3.2@2180.77,3393.43 ; Y3.2@2174.17,3394.5 cw(c2174.17,3368.58) Y3.2@2192.5,3386.91 ; Y3.2@2176.39,3379.08 ccw(c2165.75,3344.25) 2140,3370 ; Y3.2@2178.5,3393.51 cw(c2177.82,3373.97) Y3.2@2192.11,3387.31 ; Y3.2@2187,3394.5 Y3.2@2164.5,3394.5 ; Y3.2@2190.91,3407.86 cw(c2164.5,3427.28) Y3.2@2164.5,3394.5 ; 2314.57,1963.23 2251.77,1963.23 2230,1985 2010,1985 1975,2020 ; 2140,3370 Y3.2@2164.5,3394.5 ; 2316.36,1963.23 ccw(c2316.36,1980.76) 2328.76,1968.36 cw(c2316.36,1980.76) 2316.36,1963.23 ; 2316.36,1963.23 cw(c2316.36,1945.69) 2328.76,1958.09 ccw(c2316.36,1945.69) 2316.36,1963.23
  Bottom Layer w22: J2.5@999.33,1780 1032.44,1813.11 ; J2.5@1011.73,1790.32 ccw(c961.73,1840.32) 1032.44,1840.32 ; J2.5@1018.04,1794.03 ccw(c1012.6,1813.11) 1032.44,1813.11 ; J2.5@1032.4,1790.28 cw(c1043.87,1801.68) 1032.44,1813.11 ; R26.1@1032.44,1865 1032.44,1813.11
  Bottom Layer w30: P1.2@1050,3215 1125,3215 v1(1175,3265) ; P1.2@1060.27,3204.73 cw(c1085.07,3179.93) 1085.07,3215 cw(c1085.07,3250.07) P1.2@1060.27,3225.27 ; C12.1@1150,3215 cw(c1210.36,3215) v1@1167.68,3257.68 ; R4.1@1218,3281.81 ccw(c1215.7,3224.31) v1(1175,3265) ; C48.1@1387.56,3336 U15.9@1387.56,3402.4 ; R6.2@1455,3282.56 R2.1@1280,3282.56 R4.1@1220,3282.56 1192.56,3282.56 v1(1175,3265) ; J3.6@1700,1559.92 1790.08,1559.92 ; v1(1715,585) R32.2@1747.44,585 ; 1736.25,585 ccw(c1736.25,614.23) R32.2@1756.91,593.56 ; C10.1@1937.56,3207.28 cw(c1937.56,3141.89) U7.68@1983.8,3188.13 ; C10.1@1937.56,3210 1961.93,3210 U7.68@1996.14,3175.79 U7.67@1996.14,3131.3 ; U7.62@1993.94,2954.13 ccw(c2013.42,2954.13) 1999.64,2940.36 ; U7.67@1994,3130.77 ccw(c2010.08,3134.73) 2010.08,3118.17 ; U7.66@1994.58,3097.43 cw(c2044.67,3047.33) U7.15@2044.67,3118.17 ; U7.61@1996.14,2920.91 cw(c1996.14,2865.49) U7.9@2035.32,2904.68 ; U7.62@1996.14,2954.13 U7.62@1996.14,2943.86 ; U7.66@1996.14,3095.87 U7.67@1996.14,3131.3 ; U7.61@1997.89,2917.36 ccw(c1981.89,2929.61) U7.62@1996.14,2943.86 ; U7.10@2028.89,2931.27 cw(c2026.68,2974.39) U7.62@1996.14,2943.86 ; U7.10@2037.62,2939.13 ccw(c2066.27,2921.39) U7.9@2042.44,2897.56 ; C24.1@2042.44,2760 U7.9@2042.44,2897.56 ; U7.59@2054.21,3233.86 U7.57@2098.7,3233.86 U7.55@2134.13,3233.86 ; U7.18@2111.83,3190.09 2111.83,3138.17 2091.83,3118.17 ; U7.53@2170.55,3235.83 cw(c2157.09,3208.8) U7.20@2187.28,3208.8 ; U7.53@2171.13,3235.42 cw(c2132.12,3196.41) U7.20@2187.28,3196.41 ; v1@2178.86,3255.43 ccw(c2213.44,3242.3) 2187.28,3216.14 ; v1@2180.89,3254.17 cw(c2134.14,3297.83) U7.55@2134.13,3233.86 ; U7.62@1996.14,2943.86 U7.9@2042.44,2897.56 ; U7.67@1996.14,3131.3 1996.96,3131.3 2010.08,3118.17 ; 2010.08,3118.17 2091.83,3118.17 ; 2091.83,3118.17 2105,3105 2154.57,3105 2187.28,3137.72 U7.20@2187.28,3194.68 2187.28,3216.14 ; U7.55@2134.13,3233.86 U7.53@2169.57,3233.86 2187.28,3216.14
  Bottom Layer w50: J2.5@999.33,1400 J2.5@1145,1400 ; J2.5@999.33,1780 J2.5@1140,1780
  other v1: 1855,585 1645,587 1900,606.16 1265,665 1228.98,755 1195,920 2120,1125 1120,1135 1185,1135 1230,1135 1280,1135 2035.35,1168.98 1300,1170 1720,1175 1120,1205 1185,1205 1490,1265 1555,1265 1625,1265 1120,1285 1185,1285 1210,1320 1850,1325 2195,1400 2335,1400 1850,1405 1850,1485 2195,1485 2335,1485 1755,1560 2195,1565 2335,1565 1850,1570 2035.35,1738.27 2120,1738.27 1715,1750 2245,2215 1655,2705 2420,2790 2395,2825 1360,2880 1515,2880 1035,2915 2390,3175 1795,3225 2425,3235 2180,3255 1995,3285 2280,3285
IIC0_SCL: R38.3 U1.55 U7.21 | length 2106
  Top Layer w6: v1@1710,2180 1735,2180 ; v1@1720.28,2173.1 cw(c1735,2160.86) 1735,2180 ; v1@1720.28,2186.9 ccw(c1735,2199.14) 1735,2180 ; v1@1944.22,3057 cw(c1918.2,3057) 1936.6,3038.6 cw(c1955,3020.2) v1@1955,3046.22 ; v1@1958.38,3053.62 cw(c1968.95,3043.05) 1968.95,3058 ; v1@1962.62,3049.38 cw(c1983.44,3028.56) 1983.44,3058 ; v1@1962.62,3064.62 ccw(c1978.61,3080.61) 1978.61,3058 ; v1@2197.38,3050.38 ccw(c2178.98,3031.98) 2178.98,3058 ccw(c2178.98,3084.02) v1@2197.38,3065.62 ; v1(2205,3058) 1956,3058 v1(1955,3057) 1932.22,3034.22 1932.22,2907.78 2005,2835 2005,2465 1994,2454 1994,2370 2005,2359 2005,2214.85 1930.15,2140 1775,2140 1735,2180
  Bottom Layer w6: v1@1710,2180 1717.36,2172.64 U1.55@1769.96,2172.64 ; R38.3@1911.5,3074.25 1930.75,3074.25 ; R38.3@1919.37,3067.41 cw(c1919.37,3023.42) v1@1950.47,3054.53 ; R38.3@1919.37,3073.41 cw(c1919.37,3043.91) 1940.23,3064.77 ; R38.3@1919.37,3079.41 cw(c1919.37,3064.39) 1929.99,3075.01 ; R38.3@1925.41,3071.04 cw(c1930.75,3068.21) 1930.75,3074.25 ; R38.3@1925.41,3077.46 ccw(c1930.75,3080.29) 1930.75,3074.25 ; 1932.96,3064.64 ccw(c1940,3076.84) v1@1948.5,3065.6 ; 1938.66,3066.34 ccw(c1950.7,3078.37) v1@1954.06,3061.69 ; 1939.47,3060.88 cw(c1933.98,3051.37) v1@1944.59,3054.21 ; 1940.8,3060.11 ccw(c1945.93,3069) v1@1952.12,3060.81 ; 1941.55,3063.45 cw(c1935.1,3057) v1@1944.22,3057 ; v1@1952.87,3067.57 cw(c1948.05,3091.55) 1930.75,3074.25 ; v1@1955,3050 1930.75,3074.25 ; v1(2205,3058) 2205,3095 2222.72,3112.72 U7.21@2222.72,3194.68 ; U7.21@2217.88,3183.15 cw(c2206.2,3171.47) 2222.72,3171.47 cw(c2239.24,3171.47) U7.21@2227.55,3183.15
  other v1: 1712,2180
IIC0_SDA: R38.4 U1.56 U7.22 | length 2280.2
  Top Layer w6: v1(1680,2165) 1690,2155 ; v1@1685.33,2155.63 cw(c1687.25,2152.25) 1690,2155 ; v1@1689.37,2159.67 ccw(c1692.75,2157.75) 1690,2155 ; v1@1947.38,3007.38 cw(c1928.98,2988.98) 1955,2988.98 cw(c1981.02,2988.98) v1@1962.62,3007.38 ; v1@1955,3025.78 ccw(c1955,3051.8) 1973.4,3033.4 ccw(c1991.8,3015) v1@1965.78,3015 ; 2216.84,3037.63 cw(c2240,3014.47) v1@2240,3047.22 ; 2223.57,3044.35 ccw(c2209.92,3058) v1@2229.22,3058 ; 2227.09,3047.87 cw(c2240,3034.96) v1@2240,3053.22 ; v1@2237.22,3058 2214.44,3035.22 1975.22,3035.22 v1(1955,3015) 1955,2901.97 2017,2839.97 2017,2460.03 2006,2449.03 2006,2374.97 2017,2363.97 2017,2209.88 1935.12,2128 1752,2128 1725,2155 1690,2155
  Bottom Layer w6: v1(1680,2165) 1688.11,2156.89 U1.56@1769.96,2156.89 ; R38.4@1911.5,3039.61 1930.39,3039.61 ; R38.4@1916.32,3041.81 cw(c1917.46,3016) 1935.73,3034.27 ; R38.4@1916.59,3035.81 cw(c1918.28,2997.55) v1@1945.37,3024.63 ; R38.4@1916.85,3029.82 cw(c1919.1,2979.11) v1(1955,3015) 1930.39,3039.61 ; R38.4@1925.62,3036.26 cw(c1930.39,3034.53) 1930.39,3039.61 ; R38.4@1925.62,3042.95 ccw(c1930.39,3044.68) 1930.39,3039.61 ; R38.4@1926.85,3035.32 cw(c1907.82,3002.36) 1944.59,3012.21 ccw(c1919.45,3005.47) 1932.46,3028.01 ccw(c1945.48,3050.55) 1952.21,3025.41 cw(c1948.59,3038.92) 1941.6,3026.81 ; 1939.4,3028.08 cw(c1927.61,3007.66) v1@1950.38,3013.76 ; v1@1944.22,3015 ccw(c1918.2,3015) 1936.6,3033.4 ccw(c1955,3051.8) v1@1955,3025.78 ; v1@2232.38,3065.62 ccw(c2213.98,3084.02) 2240,3084.02 ccw(c2266.02,3084.02) v1@2247.62,3065.62 ; v1(2240,3058) 2240,3085 2258.15,3103.15 U7.22@2258.15,3194.68 ; U7.22@2253.31,3183.15 cw(c2241.63,3171.47) 2258.15,3171.47 cw(c2274.67,3171.47) U7.22@2262.99,3183.15
IIC2_SCL: R8.1 U1.118 U2.20 U3.6 U15.4 | length 2100.7
  Top Layer w6: v1(1165,3032) 1165,3193.94 1212.84,3241.78 1423.22,3241.78 v1(1490,3175) ; v1@1479.22,3175 ccw(c1453.2,3175) 1471.6,3193.4 ccw(c1490,3211.8) v1@1490,3185.78
  Top Layer w9: v1@1158.44,3025.44 cw(c1142.6,3009.6) 1165,3009.6 cw(c1187.4,3009.6) v1@1171.56,3025.44 ; v1(1165,3032) 1165,2990.09 1144.72,2969.81 1144.72,2815.27 1115.72,2786.27 1115.72,2398.73 1164.45,2350 v1(1190,2350) ; v1@1183.44,2343.44 ccw(c1167.6,2327.6) 1167.6,2350 ccw(c1167.6,2372.4) v1@1183.44,2356.56 ; v1@1475,3335 1484,3344 U3.6@1539,3344
  Bottom Layer w6: v1@1482.38,3182.62 ccw(c1468.12,3196.88) 1488.28,3196.88 ; 1488.28,3190.68 ccw(c1505.68,3190.68) v1@1493.38,3178.38 ; 1488.28,3205.17 ccw(c1520.17,3205.17) v1@1497.62,3182.62 ; v1(1490,3175) 1488.28,3176.72 1488.28,3248.63 ; 1497.43,3257.78 ccw(c1475.76,3279.46) R8.1@1506.31,3282 ; R8.1@1500.33,3281.5 cw(c1458.86,3278.05) 1488.28,3248.63 ; R8.1@1506.58,3266.93 ccw(c1492.65,3280.86) R8.1@1512.29,3282.5 ; R8.1@1506.94,3267.29 cw(c1513.03,3261.19) R8.1@1513.03,3269.81 ; R8.1@1515,3282.56 1515,3275.35 1488.28,3248.63
  Bottom Layer w9: U1.118@1140.04,2361.61 1140.56,2361.09 1173.92,2361.09 ; v1@1165.16,3040.16 U2.20@1227.59,3040.16 ; v1@1165.2,3031.8 cw(c1185.37,3011.63) 1185.37,3040.16 ; v1@1171.56,3025.44 cw(c1207.1,2989.9) 1207.1,3040.16 ; 1177.69,2357.32 cw(c1170.37,2350) v1@1180.72,2350 ; v1@1186.47,2358.58 cw(c1182.07,2369.25) 1173.92,2361.09 ; v1(1190,2350) 1185.01,2350 1173.92,2361.09 ; U15.4@1445,3375.31 1464.69,3375.31 1475,3365 1475,3347 v1(1465,3337)
  Bottom Layer w10: R8.1@1507.4,3290.16 ccw(c1489.05,3308.51) 1515,3308.51 ccw(c1540.95,3308.51) R8.1@1522.6,3290.16 ; v1@1508.79,3319.79 cw(c1493.8,3304.8) 1515,3304.8 cw(c1536.2,3304.8) v1@1521.21,3319.79 ; R8.1@1515,3282.56 v1@1515,3320
  other v1: 1515,3326
IIC2_SDA: R9.2 U1.119 U2.19 U3.5 U15.1 | length 2112.4
  Top Layer w6: v1@1182.38,3014.62 ccw(c1163.98,3033.02) 1190,3033.02 ccw(c1216.02,3033.02) v1@1197.62,3014.62 ; v1(1190,3007) 1190,3039.22 1177,3052.22 1177,3188.97 1217.81,3229.78 1400.22,3229.78 1488,3142 1578,3142 1590,3130 ; v1@1584.07,3119 ccw(c1576.84,3130) 1590,3130 ; v1(1590,3110) 1590,3130 ; v1@1595.93,3119 cw(c1603.16,3130) 1590,3130
  Top Layer w9: 1157.94,2389 cw(c1157.94,2352.94) v1@1183.44,2378.44 ; v1@1190,2389 1146.66,2389 1130.72,2404.94 1130.72,2780.06 1159.72,2809.06 1159.72,2963.6 1190,2993.88 v1(1190,3007)
  Bottom Layer w6: U15.1@1445,3434.37 1540.63,3434.37 1570,3405 R9.2@1570,3282.56 ; v1(1570,3285) 1570,3280 1600,3250 1600,3120 v1(1590,3110) ; v1@1582.38,3117.62 ccw(c1539.83,3160.17) 1600,3160.17 ; v1@1586.62,3113.38 ccw(c1554.32,3145.68) 1600,3145.68 ; v1@1590.86,3109.14 ccw(c1568.8,3131.2) 1600,3131.2
  Bottom Layer w9: U1.119@1140.04,2377.36 1177.36,2377.36 v1@1190,2390 ; 1195.47,3020.47 U2.19@1227.59,3020.47
  other v1: 1190,2385
IIC_SCL: R27.1 U1.21 U5.1 U6.23 | length 1457.4
  Top Layer w10: v1@1958.47,3394.53 U6.23@1987.72,3394.53 2013.79,3394.53 2023.31,3385 2023.31,3361.8 2045.76,3339.35 2094.35,3339.35 2115,3360 2115,3415 2095,3435 U5.1@2070,3435 ; v1@1964.21,3401.21 ccw(c1980.34,3417.34) U6.23@1980.34,3394.53 ; U5.1@2083.27,3431.58 cw(c2091.53,3423.31) 2091.53,3435 cw(c2091.53,3446.69) U5.1@2083.27,3438.42
  Bottom Layer w6: U1.21@1525.87,2589.96 1525.87,2627.84 1647.34,2749.31 1752.19,2749.31 1838,2835.12 1838,2965.03 1804.79,2998.24 1804.79,3185.6 1833.28,3214.1 1833.28,3289.65 1837.19,3293.56 1837.19,3339.63 R27.1@1867.56,3370
  Bottom Layer w10: R27.1@1867.56,3370 1933,3370 v1(1958,3395)
IIC_SDA: R28.2 U1.22 U5.3 U6.24 | length 1436.2
  Top Layer w10: U6.24@1987.72,3414.21 2020,3414.21 ; v1@1988.84,3426.61 ccw(c2006.09,3432.41) 2006.09,3414.21 ; v1@1998.32,3429.8 ccw(c2020,3437.08) 2020,3414.21 ; 2042.75,3372.25 ccw(c2060.16,3389.66) U5.3@2060.16,3365.04 ; U5.3@2070,3360.2 2054.8,3360.2 2039.31,3375.69 2039.31,3394.9 2020,3414.21
  Bottom Layer w6: U1.22@1541.61,2589.96 1541.61,2626.61 1652.31,2737.31 1757.16,2737.31 1850,2830.15 1850,2970 1816.79,3003.21 1816.79,3180.63 1845.28,3209.13 1845.28,3264.49 1867.56,3286.77 ; R28.2@1859.67,3303.02 cw(c1846.88,3286.77) 1867.56,3286.77 ; R28.2@1867.56,3315 1867.56,3286.77 ; R28.2@1875.45,3303.02 ccw(c1888.24,3286.77) 1867.56,3286.77
  Bottom Layer w10: R28.2@1867.56,3315 1913.04,3315 1990,3391.96 v1(1990,3427) ; R28.2@1875.16,3307.4 cw(c1893.51,3289.05) 1893.51,3315 cw(c1893.51,3340.95) R28.2@1875.16,3322.6 ; v1@1983.79,3420.79 cw(c1968.8,3405.8) 1990,3405.8 cw(c2011.2,3405.8) v1@1996.21,3420.79
IMON: U1.1 U2.24 | length 735.4
  Top Layer w6: v1@1174.67,2608.08 ccw(c1165.32,2610.88) 1172.22,2617.78 ; v1@1181.92,2615.33 cw(c1179.12,2624.68) 1172.22,2617.78 ; v1(1185,2605) 1172.22,2617.78 ; v1(1220,3145) 1215,3140 1215,2999.78 1173.22,2958.01 1173.22,2912.84 1215,2871.06 1215,2715 1172.22,2672.22 1172.22,2617.78
  Bottom Layer w6: v1(1185,2605) 1200.04,2589.96 ; v1@1186.64,2594.35 cw(c1189.01,2578.94) 1200.04,2589.96 ; v1@1195.65,2603.36 ccw(c1211.06,2600.99) 1200.04,2589.96 ; U1.1@1210.91,2589.96 1200.04,2589.96 ; v1@1215.98,3135 cw(c1209.07,3117.82) U2.24@1227.59,3117.82 ; v1@1218.22,3140.57 cw(c1212.64,3126.7) 1227.59,3126.7 ; U2.24@1227.59,3118.9 1227.59,3132.41
IQR1: U1.19 U3.7 | length 1480
  Top Layer w10: U3.7@1539,3394 1469,3394 1440,3365 1440,3325 1565,3200 1680.44,3200 1700.22,3219.78 ; 1713.26,3219.78 ccw(c1713.26,3233.15) v1@1726.18,3229.68 ; v1@1716.52,3232.28 cw(c1700.22,3236.66) 1700.22,3219.78 ; v1@1716.63,3227.35 cw(c1709.47,3225.09) 1714.78,3219.78 ; v1@1722.35,3221.63 ccw(c1720.09,3214.47) 1714.78,3219.78 ; v1(1725,3230) 1714.78,3219.78 ; 1700.22,3219.78 1714.78,3219.78
  Bottom Layer w6: U1.19@1494.37,2589.96 1494.37,2630.28 1637.4,2773.31 1742.25,2773.31 1814,2845.06 1814,2955.09 1779,2990.09 1779,3201 1750,3230 ; v1(1725,3230) 1750,3230 ; v1@1732.84,3222.6 cw(c1750,3206.4) 1750,3230 ; v1@1732.84,3237.4 ccw(c1750,3253.6) 1750,3230
IQR2: U1.16 U3.3 | length 1569.4
  Top Layer w6: v1(1451,2520) 1520,2589 v1(1520,2690)
  Top Layer w10: U3.3@1319,3344 1398.37,3344 1558.37,3184 v1@1719,3184 ; U3.3@1351.95,3339.05 cw(c1363.9,3327.1) 1363.9,3344 cw(c1363.9,3360.9) U3.3@1351.95,3348.95
  Bottom Layer w6: v1@1447.13,2522.87 U1.16@1447.13,2589.96 ; v1(1520,2690) 1537.12,2690 ; v1@1529.72,2685.34 cw(c1537.12,2681.8) 1537.12,2690 ; v1@1529.72,2694.66 ccw(c1537.12,2698.2) 1537.12,2690 ; v1@1725,3184.22 cw(c1725,3141.3) 1755.35,3171.65 ; v1@1725,3190.22 cw(c1725,3161.78) 1745.11,3181.89 ; v1(1725,3195) 1732,3195 1767,3160 1767,2985.12 1802,2950.12 1802,2850.03 1737.28,2785.31 1632.43,2785.31 1537.12,2690 ; v1@1735.78,3195 ccw(c1744.9,3195) 1738.45,3188.55
KEY1: pad.1@2235,645 U1.48 | length 2661.2
  Top Layer w6: v1@1577.38,2167.38 cw(c1558.98,2148.98) 1585,2148.98 cw(c1611.02,2148.98) v1@1592.62,2167.38 ; v1(1585,2175) 1585,2096.87 1692.87,1989 2190.06,1989 2226,1953.06 2226,1047.03 2244.47,1028.56 2244.47,929.47 v1(2225,910) ; v1@2225,920.78 ccw(c2225,946.8) 2243.4,928.4 ccw(c2261.8,910) v1@2235.78,910
  Bottom Layer w6: v1(1585,2175) 1587.78,2175 1695.66,2282.87 U1.48@1769.96,2282.87 ; v1@1585,2179.78 ccw(c1585,2198.04) 1597.91,2185.13 ; v1@1585,2185.78 ccw(c1585,2218.53) 1608.16,2195.37 ; v1@1595.78,2175 cw(c1615.08,2175) 1601.43,2188.65 ; pad.1@2220.42,659.58 ccw(c2177.97,702.03) 2238,702.03 ; pad.1@2224.66,655.34 ccw(c2192.46,687.54) 2238,687.54 ccw(c2277.54,687.54) pad.1@2249.58,659.58 ; v1(2225,910) 2225,908 2238,895 ; v1@2226.06,899.27 cw(c2227.51,884.51) 2238,895 ; pad.1@2228.9,651.1 ccw(c2206.94,673.06) 2238,673.06 ccw(c2263.06,673.06) pad.1@2245.34,655.34 ; v1@2235.24,906.62 ccw(c2246.05,903.05) 2238,895 ; pad.1@2238,642 2238,895
KEY2: SW2.2 U1.49 | length 2516.1
  Top Layer w6: v1@1609.42,2172.95 cw(c1583.69,2167.96) 1602.22,2149.44 ; 1610.21,2157.42 ccw(c1597.07,2170.56) v1@1615.31,2174.09 ; 1614.89,2162.1 cw(c1620,2156.99) v1@1620,2164.22 ; v1(1620,2175) 1620,2167.22 1602.22,2149.44 ; v1@2256.87,917.08 ccw(c2250.54,922.59) 2256.47,928.53 ; 2261.02,923.98 cw(c2255.4,918.36) v1@2261.39,913.14 ; v1(2265,910) 2270,915 2256.47,928.53 ; 1602.22,2149.44 1602.22,2096.62 1697.84,2001 2195.03,2001 2238,1958.03 2238,1052 2256.47,1033.53 2256.47,928.53
  Bottom Layer w6: v1@1617.29,2185.43 ccw(c1616.38,2188.94) 1620,2188.94 ; v1(1620,2175) 1620,2188.94 ; v1@1622.71,2185.43 cw(c1623.62,2188.94) 1620,2188.94 ; U1.49@1769.96,2267.13 1698.19,2267.13 1620,2188.94 ; v1@2254.35,908.34 cw(c2239.05,905.95) 2250,895 ; v1@2263.34,899.35 ccw(c2260.95,884.05) 2250,895 ; v1(2265,910) 2250,895 ; SW2.2@2324.71,653.77 ccw(c2309.67,638.73) 2309.67,660 ccw(c2309.67,681.27) SW2.2@2324.71,666.23 ; SW2.2@2354.57,660 2300,660 2250,710 2250,895
KEY3: SW3.2 U1.50 | length 2106.2
  Top Layer w6: v1@1617.38,2132.38 cw(c1598.98,2113.98) 1625,2113.98 cw(c1651.02,2113.98) v1@1632.62,2132.38 ; v1(1625,2140) 1625,2090.81 1702.81,2013 2200,2013 2250,1963 2250,1070 v1(2295,1025) ; v1@2284.22,1025 ccw(c2258.2,1025) 2276.6,1043.4 ccw(c2295,1061.8) v1@2295,1035.78
  Bottom Layer w6: v1@1625,2135 v1(1625,2140) 1643,2158 ; v1@1625.17,2150.78 ccw(c1625.56,2175.44) 1643,2158 ; v1@1635.78,2140.17 cw(c1660.44,2140.56) 1643,2158 ; U1.50@1769.96,2251.38 1699.41,2251.38 1643,2194.97 1643,2158
  Bottom Layer w15: v1(2295,1025) SW3.2@2354.57,1025 ; v1@2299.44,1020.56 cw(c2310.16,1009.84) 2310.16,1025 cw(c2310.16,1040.16) v1@2299.44,1029.44
KEY4: SW4.2 U1.51 | length 1203.2
  Top Layer w6: v1@1650.82,2129.98 cw(c1642.13,2122.53) 1650.22,2114.44 ; 1654.8,2119.02 ccw(c1647.06,2126.76) v1@1655.37,2133.89 ; v1(1659,2137) 1659,2123.22 1650.22,2114.44 ; v1@2265.38,1922.62 ccw(c2246.98,1941.02) 2273,1941.02 ccw(c2299.02,1941.02) v1@2280.62,1922.62 ; v1(2273,1915) 2273,1956.97 2204.97,2025 1707.78,2025 1650.22,2082.56 1650.22,2114.44
  Bottom Layer w6: v1@1651.38,2144.62 ccw(c1642.63,2153.37) 1655,2153.37 ; 1655,2158.2 ccw(c1680.2,2158.2) v1@1662.38,2140.38 ; 1655,2172.68 ccw(c1694.68,2172.68) v1@1666.62,2144.62 ; v1@1665,2140 1655,2150 1655,2190 1700.63,2235.63 U1.51@1769.96,2235.63
  Bottom Layer w15: v1(2273,1915) SW4.2@2354.57,1915 ; v1@2277.44,1910.56 cw(c2288.16,1899.84) 2288.16,1915 cw(c2288.16,1930.16) v1@2277.44,1919.44
KEY5: SW5.2 U1.47 | length 1118
  Top Layer w6: v1@2187.38,2472.38 cw(c2168.98,2453.98) 2195,2453.98 cw(c2221.02,2453.98) v1@2202.62,2472.38 ; v1(2195,2480) 2195,2402.5 2157.5,2365 2145,2365 2117.22,2337.22 2117.22,2302.78 2140,2280 v1(2275,2280) ; v1@2267.38,2272.38 ccw(c2248.98,2253.98) 2248.98,2280 ccw(c2248.98,2306.02) v1@2267.38,2287.62
  Bottom Layer w6: U1.47@1769.96,2298.62 1928.47,2298.62 2079.93,2450.07 2079.93,2463.45 2096.47,2480 v1(2195,2480) ; v1@2187.38,2472.38 ccw(c2168.98,2453.98) 2168.98,2480 ccw(c2168.98,2506.02) v1@2187.38,2487.62
  Bottom Layer w15: v1(2275,2280) SW5.2@2354.57,2280 ; v1@2279.44,2275.56 cw(c2290.16,2264.84) 2290.16,2280 cw(c2290.16,2295.16) v1@2279.44,2284.44
KEY6: D3.2 R25.1 U1.46 | length 1359.1
  Bottom Layer w6: U1.46@1769.96,2314.37 1927.25,2314.37 2067.93,2455.04 2067.93,2468.42 2104.28,2504.78 2279.79,2504.78 2295,2489.57 2292.44,2487.01 R25.1@2292.44,2415 ; 2211.53,2504.78 cw(c2211.53,2400.9) D3.2@2284.98,2474.36 ; 2226.02,2504.78 cw(c2226.02,2415.39) D3.2@2289.23,2478.6 ; 2240.5,2504.78 cw(c2240.5,2429.87) D3.2@2293.47,2482.84 ; 2254.99,2504.78 cw(c2254.99,2444.36) D3.2@2297.71,2487.08 ; 2269.47,2504.78 cw(c2269.47,2458.85) D3.2@2301.96,2491.33 ; R25.1@2283.43,2425.98 ccw(c2261.66,2447.74) 2292.44,2447.74 ccw(c2323.22,2447.74) R25.1@2301.46,2425.98 ; D3.2@2284.98,2466.48 cw(c2266.98,2448.48) 2292.44,2448.48 ; R25.1@2285.25,2427.5 ccw(c2272.19,2446.63) 2294.96,2442.34 ; R25.1@2285.95,2427.94 ccw(c2269.28,2456.15) 2301.02,2448 ; R25.1@2287.67,2421.74 ccw(c2276.15,2433.26) 2292.44,2433.26 ccw(c2308.73,2433.26) R25.1@2297.21,2421.74 ; R25.1@2289.01,2422.78 ccw(c2279.7,2438.52) 2297.41,2433.97 ; R25.1@2292.44,2414.62 cw(c2365.24,2414.62) D3.2@2314.06,2466.4 ; R25.1@2292.44,2428.99 cw(c2351.04,2428.99) D3.2@2309.85,2470.66 ; 2292.44,2443.35 cw(c2336.84,2443.35) D3.2@2305.63,2474.93 ; D3.2@2292.44,2457.72 cw(c2322.64,2457.72) D3.2@2301.41,2479.2 ; 2293.35,2433.78 ccw(c2306.37,2431.32) R25.1@2297.14,2421.81 ; 2295.41,2444.74 ccw(c2315.68,2440.92) R25.1@2301.32,2426.12 ; 2300.32,2445.26 ccw(c2328.19,2438.1) R25.1@2303.42,2423.46
L4_EN: R2.2 U1.3 U2.26 | length 1040
  Top Layer w6: v1@1240.19,2699.46 ccw(c1234.87,2701.87) 1239,2706 ; v1@1245.54,2704.81 cw(c1243.13,2710.13) 1239,2706 ; v1(1250,2695) 1239,2706 ; 1264.76,3168.98 ccw(c1239.49,3194.25) v1@1275.22,3194.91 ; v1@1269.22,3194.8 cw(c1219.9,3193.89) 1254.78,3159 ; 1274.74,3178.96 ccw(c1259.09,3194.61) v1@1281.22,3195.02 ; v1@1280,3184.22 1254.78,3159 ; 1239,2706 1239,2881 1197.22,2922.78 1197.22,2948.06 1239,2989.84 1239,3105.03 1254.78,3120.81 1254.78,3159
  Top Layer w8: v1@1280,3184.22 v1(1280,3195)
  Bottom Layer w6: 1242.4,2640 1250,2647.6 v1(1250,2695) ; v1@1242.38,2687.38 cw(c1223.98,2668.98) 1250,2668.98 cw(c1276.02,2668.98) v1@1257.62,2687.38
  Bottom Layer w8: U1.3@1242.4,2589.96 1242.4,2640 ; R2.2@1271.69,3219.13 cw(c1249.74,3197.18) v1@1280.79,3197.18 ; v1@1273.08,3188.08 cw(c1254.49,3169.49) 1280.79,3169.49 ; v1@1273.08,3201.92 ccw(c1254.49,3220.51) R2.2@1280.79,3220.51 ; v1@1274.48,3203.07 ccw(c1270.61,3208.72) 1277.22,3210.49 ccw(c1285.9,3212.81) v1@1283.07,3204.28 ; v1@1276.39,3204.09 ccw(c1271.76,3215.75) 1283.87,3212.5 ccw(c1294.18,3209.74) v1@1286.78,3202.05 ; R2.2@1280,3227.44 1280.79,3226.65 U2.26@1280.79,3152.41 ; 1280.79,3173.29 cw(c1301.71,3173.29) v1@1286.92,3188.08 ; v1@1280.79,3200.98 cw(c1306.46,3200.98) R2.2@1288.31,3219.13 ; R2.2@1280.79,3216.71 ccw(c1301.71,3216.71) v1@1286.92,3201.92